# Altium PCB CAN_PDM_Pcb.PcbDoc (part 2 of 3)
Units mm, origin at the board's own origin, x right, y up, seen from the top; angles counter-clockwise.
Board outline 120 x 90 mm, 4 copper layers (Top Layer, Int1 (GND-PWR), Int2 (PWR-3V3), Bottom Layer), stack 1.51 mm thick; 313 components, 200 nets, 938 pads, 544 vias.
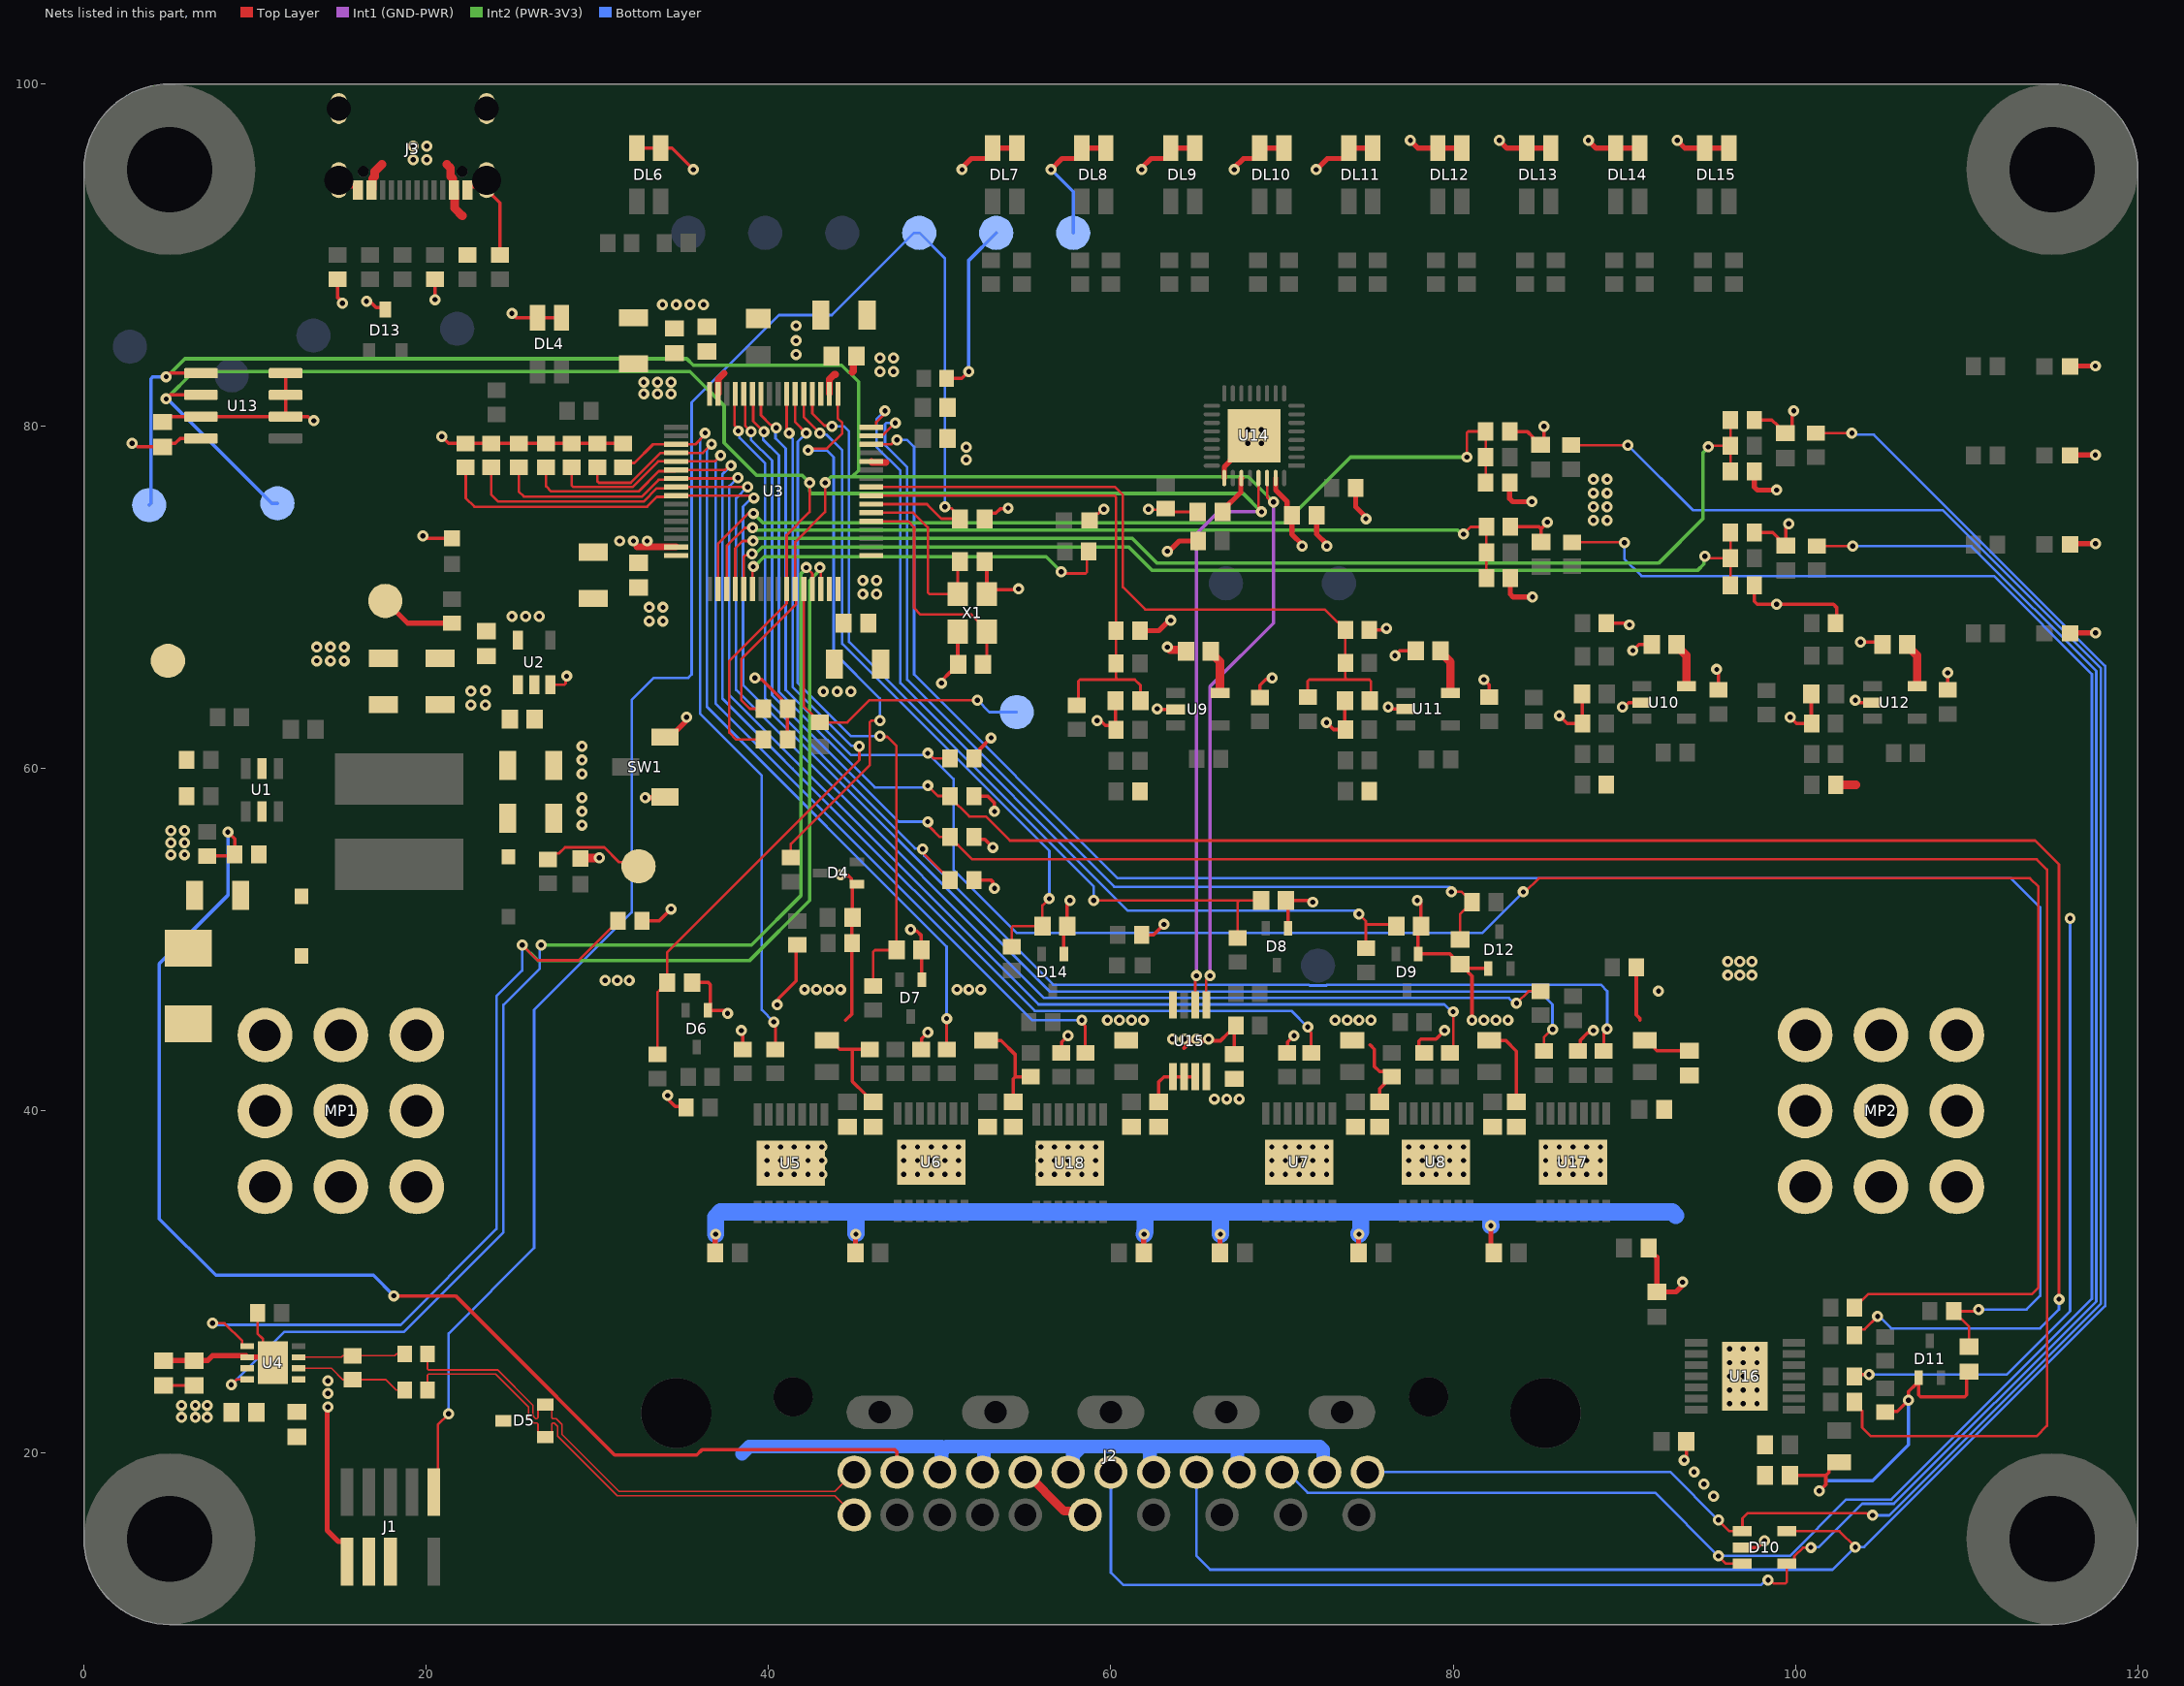
[diagram p4: the nets of this part, all layers, seen from the top]

## Part data
C1: Case=1206, Manufacturer=KEMET, PartNumber=C1206C225K5RAC, Voltage=50V
C2: Case=0606, Manufacturer=KEMET, PartNumber=C0603C104K5RACTU, Voltage=50V
C3 C4 C5 C6 C9 C11 C13 C15: Case=1206, Manufacturer="Samsung Electro-Mechanics", PartNumber=CL31B106KBHNNNE, Voltage=50V
C7 C8 C18 C59 C60: Case=0603, Manufacturer=KEMET, PartNumber=C0603C105K8RACTU, Voltage=10V
C10 C12 C14 C16 C17 C21 C23 C24 C25 C27 C28 C30 C34 C38 C42 C47 C48 C51 C52 C57 C58 C62 C67 C72: Case=0603, Manufacturer=KEMET, PartNumber=C0603C104K5RACTU, Voltage=50V
C19 C20: Case=0603, Manufacturer=YAGEO, PartNumber=CC0603FRNPO0BN270, Voltage=100V
C22: Case=0805, Manufacturer=KEMET, PartNumber=C1206C475K5RACTU, Voltage=50V
C26: Case=0603, Manufacturer=YAGEO, PartNumber=CC0603KRX7R9BB473, Voltage=50V
C29 C33 C37 C41 C61 C66 C71: Case=0603, Manufacturer=KEMET, PartNumber=C0603C473M5RACTU, Voltage=50V
C31 C35 C39 C43 C63 C64 C68 C69 C73: Case=0603, Manufacturer=KEMET, PartNumber=C0603C103M5RACTM, Voltage=50V
C32 C36 C40 C44 C65 C70 C74: Case=0603, Manufacturer=KEMET, PartNumber=C0603C221J5RACTU, Voltage=50V
C45 C46 C49 C50: Case=0603
C53 C54 C55 C56: Case=0603, Manufacturer=KEMET, PartNumber=C0603C103K1RACTU, Voltage=100V
D1 D2: Case=SOD123, Manufacturer=Nexperia, PartNumber=PMEG4010EGWX
D3: library part Diode_TVS_Bid, Case=SMB-2, Manufacturer=Littelfuse, PartNumber=SZ1SMB20CAT3G, Voltage=20V
D4: Case=SOT323, Manufacturer=Nexperia, PartNumber=BZX84W-C4V7-QX
D5: library part SM712-02HTG, "ESD Diode bid", Case=SOT23-3, Manufacturer=Littelfuse, PartNumber=SM712-02HTG
D6: Case=SOT-323-3, Manufacturer=NEXPERIA, PartNumber=BZX84W-C4V7-QX
D7 D8 D9 D11 D12 D14: Case=SOT-323-3, Manufacturer=Nexperia, PartNumber=BZX84W-C4V7-QX
D10: library part SP0504BAHTG, Case=SOT-23-5, Manufacturer=Littelfuse, PartNumber=SP0504BAHTG
D13: "ESD Diode bid -7 to 12v", Case=SOT23-3, Manufacturer=Littelfuse, PartNumber=SM712-02HTG
DL1 DL2: library part LED_Green, Case=0603, Manufacturer="Wurth Elektronik", PartNumber=150060GS75000
DL3: library part LED_Blue, Case=0603, Manufacturer="Wurth Elektronik", PartNumber=150060BS75000
DL4 DL6: "Led Yellow - Blue 3528", Case=3528, Manufacturer=Wurth, PartNumber=150141YB73100
DL5: Case=0603, Manufacturer="Wurth Elektronik", PartNumber=150060RS75000
DL7 DL8 DL9 DL10 DL11 DL12 DL13 DL14 DL15: "Led Red - Green 3528", Case=3528, Manufacturer=Wurth, PartNumber=150141RV73100
DL16 DL17 DL18 DL19: library part LED_Blue, Case=0603, Manufacturer="Wurth Elektronik", PartNumber=150060BS55040
J1: library part FTSH-105-X-X-DV-007-P-X, Manufacturer=Samtech, PartNumber=FTSH-105-01-L-DV-007-K
J2: library part MOLEX_477450100, "Connector Header Board Edge, Through Hole, Right Angle 28 position", Manufacturer=Molex, PartNumber=0477450100
J3: "USB Connectors USB Type C,2.0, Rec,SMT, 0.95mmTH Shell Stakes,G/F,RA,Top Mnt,T&R", Case=USB-C, Manufacturer=GCT, PartNumber=USB4105-GF-A
L1: Case=SDE0805A, Manufacturer=BOURNS, PartNumber=SDE0805A-180M
L2: Case=0603, Manufacturer=TDK, PartNumber=MMZ1608R601ATD25
L3 L4: Case=0603, Manufacturer=Murata, PartNumber=BLM18HB331SN1D
MP1 MP2: library part 74651195R, Manufacturer="Wurth Electronics", PartNumber=74651195R
R1: library part Resistor, Case=0603, Manufacturer=Vishay, PartNumber=CRCW060388K7FKEAC
R2 R16 R17 R100 R101 R124 R125 R126 R127 R128 R129 R130 R131 R132 R133 R134 R135 R136 R137 R138 R139 R140 R141: library part Resistor, Case=0603, Manufacturer=Vishay, PartNumber=RC0603FR-071K3L
R3 R4 R9 R14 R15 R18 R19 R32 R33 R46 R47 R58 R59 R62 R63 R74 R75 R78 R79 R84 R85 R86 R87 R92 R93 R102 R103 R104 R113 R114 R115 R152: library part Resistor, Case=0603, Manufacturer=YAGEO, PartNumber=AC0603FR-0710KL
R5: library part Resistor, Case=0603, Manufacturer=Vishay, PartNumber=CRCW060322K1FKEA
R6 R8 R99 R142 R143 R144 R145: library part Resistor, Case=0603, Manufacturer=Vishay, PartNumber=RC0603FR-07560RL
R7 R11 R48 R49 R50 R51 R54 R55 R60 R61 R64 R65 R66 R67 R70 R71 R76 R77 R146 R147: library part Resistor, Case=0603, Manufacturer=YAGEO, PartNumber=RC0603JR-070RL
R10: library part Resistor, Case=0603, Manufacturer=Vishay, PartNumber=CRCW060351K0FKEA
R12: library part Resistor, Case=0603, Manufacturer=Vishay, PartNumber=CRCW06037K50FKEA
R13: library part Resistor, Case=0603, Manufacturer=Vishay, PartNumber=CRCW0603120RFKEA
R20 R26 R34 R40 R105 R116 R153: library part Resistor, Case=0805, Manufacturer=Vishay, PartNumber=CRCW080547R0FKEA
R21 R22 R23 R24 R27 R28 R29 R30 R35 R36 R37 R38 R41 R42 R43 R44 R80 R81 R82 R83 R88 R89 R90 R91 R106 R107 R108 R109 R110 R111 R117 R118 R119 R120 R121 R122 R154 R155 R156 R157: library part Resistor, Case=0603, Manufacturer=YAGEO, PartNumber=RC0603FR-074K7L
R25 R31 R39 R45 R112 R123 R158: library part Resistor, Case=0603, Manufacturer=Vishay, PartNumber=CRCW06031K20FKEA
R52 R53 R56 R57 R68 R69 R72 R73: library part Resistor, Case=0603, Manufacturer=Vishay, PartNumber=CRCW060315K0FKEC
R94 R95: library part Resistor, Case=0603, Manufacturer=Vishay, PartNumber=CRCW06034K70FKEB
R96 R97: library part Resistor, Case=0603, Manufacturer=Vishay, PartNumber=CRCW060310K0FKEA
R98: library part Resistor, Case=0603, Manufacturer=Vishay, PartNumber=CRCW06030000Z0EAC
R148 R149: library part Resistor, "Resistor", Case=0603, Manufacturer=Vishay, PartNumber=CRCW06035K10FKEC
R150 R151: Case=0603, Manufacturer=Vishay, PartNumber=CRCW06035K10FKEC
SW1: library part SWITCH_SPDT, Manufacturer="Nidec Components", PartNumber=CJS-1200TA
TP1 TP2 TP3 TP4 TP5 TP6 TP7 TP8 TP9 TP12 TP13 TP14 TP15 TP16 TP24: library part Test_Point
TP19 TP20 TP21 TP22: library part Test_Point, "Test Poin"
U1: library part LV3842XDBVR, "4-V to 36-V, 600-mA synchronous step-down converter", Case=6-SOT-23, Manufacturer="Texas Instruments", PartNumber=LV3842XDBVR
U2: "LDO Voltage Regulators 500-mA high-PSRR low-IQ low-dropout voltage regulator with enable", Case=SOT-23-5, Manufacturer="Texas Instruments", PartNumber=TLV75533PDBVR
U3: "IC MCU 32BIT 512KB FLASH 64LQFP", Manufacturer=ST, PartNumber=STM32F446RET6
U4: library part TJA1051TK/3, "CAN HIGH-SPEED CAN TRANSCEIVER 3.3V / 5V Pin VIO", Case=HVSON-8, Manufacturer="NXP Semiconductors", PartNumber=TJA1051TK/3,118
U5 U6 U18: "Smart High-Side Power Switch 21A", Case=TSDSO-14, Manufacturer="Infineon Technologies", PartNumber=BTS70021EPPXUMA1
U7 U8: "Smart High-Side Power Switch 15A", Case=TSDSO-14, Manufacturer="Infineon Technologies", PartNumber=BTS70041EPZXUMA1
U9 U10 U11 U12: "Amp. op. One-channel, 1-MHz rail-to-rail input and output 1.8-V to 5.5-V operational amplifier 5-SOT-23 -40 to 125", Case=SOT23-5, Manufacturer="Texas Instrument", PartNumber=TLV9001IDBVR
U13: "F-RAM 4kbit FRAM, I2C, 3.0V 5.5V - SOP8 T&R", Manufacturer="Infineon Technologies", PartNumber=FM24CL16B-GTR
U14: "IC EXPANDER 24B 32HUQFN", Case=HUQFN-32, Manufacturer="NXP Semiconductors", PartNumber=PCAL6524HEAZ
U15: "+ / - 0.5 degC Maximum Accuracy Digital Temperature Sensor, 400 uA, 2.7 to 5.5 V, -40 to 125 degC, 8-pin MSOP (MS8), Tube", Case=MSOP-8, Manufacturer=Microchip, PartNumber=MCP9808-E/MS
U16: "Smart High-Side Power Switch 7.5A", Case=TSDSO-14, Manufacturer="Infineon Technologies", PartNumber=BTS70082EPZXUMA1
U17: "Smart High-Side Power Switch 3A", Case=TSDSO-14, Manufacturer="Infineon Technologies", PartNumber=BTS70802EPAXUMA1
X1: library part Crystal, Manufacturer=Abracom, PartNumber=ABM8AIG-8.000MHZ-1Z-T

## Free pads (board coordinates)
  round 10 hole 5 unplated: ""(5,15) ""(5,95) ""(115,15) ""(115,95)

## Via types
v1: diameter 0.65, hole 0.3, Top Layer to Bottom Layer, 543 vias
v2: diameter 0.63, hole 0.3, Top Layer to Bottom Layer, 1 vias

## Nets (pads, with @x,y where several pads share a name; then routed paths per layer and width w, separated by ;. In a path a pad name is that pad's centre, name@x,y a point inside that pad or via, vN(x,y) a via of type N, cw(c..) or ccw(c..) an arc to the next point about the centre after c; other vN are vias at no path point)
5V: C3.1 C4.1 C5.1 C6.1 C7.1 C25.1 C26.1 C28.1 C47.1 C48.1 C51.1 C52.1 C59.1 D2.C J3.A4-B9 J3.B4-A9 R2.2 R48.2 R50.2 R64.2 R66.2 R148.2 TP6.1 U2.1 U2.3 U4.3 U9.5 U10.5 U11.5 U12.5 U14.27 | length 28.6
  Top Layer w0.15: C25.1@4.638,23.965 C26.1@6.438,23.965 ; R2.2@27.1,54.7 27.447,55.047 27.747,55.047 28.1,55.4 30.4,55.4 31.263,54.537 32.163,54.537 TP6.1@32.4,54.3 ; U2.3@27.25,64.9 28.046,64.9 28.134,64.988 28.134,65.334 v1(28.2,65.4)
  Top Layer w0.3: C59.1@66.525,75 66.525,75.075 67.595,76.145 67.595,76.944 U14.27@67.626,76.974
  Top Layer w0.5: J3.B4-A9@16.8,93.81 16.85,93.86 16.85,94.47 16.985,94.605 16.985,94.885 17.4,95.3 ; 21.2,95.3 21.415,95.085 21.415,94.605 21.55,94.47 21.55,93.86 J3.A4-B9@21.6,93.81 21.65,93.76 21.65,92.75 22.1,92.3 ; C47.1@65.837,66.861 65.837,66.786 66.378,66.245 U9.5@66.378,64.415 ; C51.1@79.261,66.875 79.261,66.8 79.836,66.225 U11.5@79.836,64.429 ; C48.1@93.055,67.261 93.055,67.186 93.63,66.611 U10.5@93.63,64.815 ; R66.2@102.358,59.054 103.529,59.054 ; C52.1@106.537,67.261 106.537,67.186 107.112,66.611 U12.5@107.112,64.811
  other v1: 5.7,22.1 6.5,22.1 7.2,22.1 5.7,22.8 6.5,22.8 7.2,22.8 22.6,63.725 23.45,63.725 22.6,64.525 23.45,64.55 88.2,74.5 89,74.5 88.2,75.3 89,75.3 88.2,76.1 89,76.1 88.2,76.9 89,76.9 19.225,95.575 20.025,95.575 19.225,96.375 20.025,96.375
+3V3: C8.1 C9.1 C10.1 C11.1 C12.1 C13.1 C14.1 C15.1 C16.1 C23.1 C27.1 C28.2 C57.1 C58.1 C60.1 J1.1 J2.8 J2.9 J2.11 J2.13 J2.15 J2.17 L2.1 R6.2 R14.2 R21.2 R27.2 R35.2 R41.2 R49.2 R51.2 R65.2 R67.2 R78.2 R79.2 R86.2 R87.2 R94.2 R95.2 R96.2 R97.2 R99.2 R106.2 R117.2 R154.2 SW1.1 TP7.1 TP8.1 U2.5 U3.1 U3.19 U3.32 U3.48 U3.64 U4.5 U13.8 U14.31 U15.8 | length 154.5
  Top Layer w0.2: v1(2.8,79) 2.922,79 3.122,78.8 C57.1@4.6,78.8 4.808,79.008 5.333,79.008 5.62,79.295 U13.8@6.825,79.295 ; R14.2@32.6,51.1 33.6,51.1 v1(34.3,51.8) ; v1(38.4,44.7) 38.5,44.6 R21.2@38.5,43.6 ; v1(39.2,65.3) 39.286,65.214 39.586,65.214 40.75,64.05 40.75,63.85 R94.2@41.1,63.5 R95.2@41.1,61.7 ; R27.2@48.9,43.6 48.933,43.633 48.933,44.233 v1(49.3,44.6) ; L2.1@50.4,82.8 51.3,82.8 v1(51.7,83.2) ; R154.2@57.1,43.4 57.133,43.433 57.133,44.033 v1(57.5,44.4) ; R99.2@61.8,50.3 62.5,50.3 v1(63.1,50.9) ; R35.2@70.3,43.4 70.333,43.433 70.333,44.033 v1(70.7,44.4) ; R65.2@75.1,68.101 76.001,68.101 v1(76.1,68.2) ; R41.2@78.3,43.4 78,43.7 78,44.083 78.117,44.2 79,44.2 v1(79.5,44.7) ; R117.2@87.3,43.5 87.433,43.633 87.433,44.133 87.858,44.558 87.936,44.558 88.078,44.7 v1(88.2,44.7) ; R51.2@88.95,68.497 90.203,68.497 v1(90.3,68.4) ; R87.2@97.6,70.7 97.6,69.776 97.776,69.6 v1(98.9,69.6) 102.224,69.6 102.4,69.424 102.4,68.55 R67.2@102.35,68.5 ; R106.2@103.45,24.5 103.55,24.6 v1(104.3,24.6)
  Top Layer w0.3: v1(14.25,22.7) 14.2,22.65 14.2,15.5 14.853,14.847 15.065,14.847 15.36,14.552 J1.1@15.36,13.665 ; TP7.1@17.6,69.8 18.9,68.5 R6.2@21.5,68.5 ; v1(32.788,58.3) 33.9,58.3 SW1.1@33.95,58.35 ; R49.2@61.7,68.061 62.8,68.061 63.4,68.661 v1(63.5,68.661) ; v1(63.3,72.7) 63.4,72.7 64,73.3 R97.2@65.1,73.3 ; U14.31@69.626,76.974 69.626,76.274 70.301,75.599 70.301,75.074 C58.1@70.575,74.8 70.575,73.7 71.175,73.1 v1(71.175,73) ; R96.2@74.3,76.4 74.3,75.3 74.9,74.7 v1(74.9,74.6) ; R78.2@83.3,76.7 83.3,75.776 83.476,75.6 v1(84.6,75.6) ; R86.2@83.339,71.125 83.339,70.201 83.515,70.025 v1(84.639,70.025) ; R79.2@97.6,77.375 97.6,76.451 97.776,76.275 v1(98.9,76.275)
  Bottom Layer w0.15: v1(104.3,24.6) 112.342,24.6 116.05,28.308 v2(116.05,51.25)
  Bottom Layer w0.2: v1(51.7,83.2) 51.7,89.7 TP8.1@53.3,91.3
  Bottom Layer w0.8: 38.45,19.975 38.875,20.4 50.1,20.4 ; J2.8@50,18.9 50.1,19 50.1,20.1 50.4,20.4 52.7,20.4 ; J2.9@52.5,18.9 52.57,18.97 52.57,20.27 52.7,20.4 ; J2.11@57.5,18.9 57.777,19.177 57.777,19.877 58.3,20.4 ; J2.13@62.5,18.9 62.28,19.12 62.28,20.12 62,20.4 ; J2.15@67.5,18.9 67.4,19 67.4,20.2 67.2,20.4 ; J2.17@72.5,18.9 72.4,19 72.4,20.2 72.2,20.4 67.2,20.4 ; 52.7,20.4 58.3,20.4 ; 58.3,20.4 62,20.4 ; 62,20.4 67.2,20.4
  other v1: 14.25,23.5 14.25,24.225 66.049,40.7 66.769,40.7 67.5,40.7 30.45,47.625 31.15,47.625 31.85,47.625 96.05,47.925 96.75,47.925 97.45,47.925 96.05,48.725 96.75,48.725 97.45,48.725 33.025,68.625 33.825,68.625 25,68.9 25.8,68.9 26.6,68.9 33.025,69.425 33.825,69.425 45.5,70.2 46.3,70.2 45.5,71 46.3,71 32.7,81.9 33.5,81.9 34.3,81.9 32.7,82.575 33.5,82.575 34.3,82.575 41.6,84.2 41.6,85 41.6,85.875
+12V: C29.1 C30.1 C33.1 C34.1 C37.1 C38.1 C41.1 C42.1 C61.1 C62.1 C66.1 C67.1 C71.1 C72.1 D1.A D3.2 MP1.1 MP2.1 R10.2 U5.15 U6.15 U7.15 U8.15 U16.15 U17.15 U18.15 | length 4
  Top Layer w0.2: v1(40.5,46.2) 40.586,46.286 40.586,46.586 41.6,47.6 41.6,49.625 R10.2@41.675,49.7
  other v1: 96.15,22.9 96.95,22.9 97.75,22.9 96.15,23.7 96.95,23.7 97.75,23.7 96.15,24.5 96.95,24.5 97.75,24.5 96.15,25.3 96.95,25.3 97.75,25.3 96.15,26.1 96.95,26.1 97.75,26.1 39.9,36.3 40.7,36.3 41.5,36.3 42.3,36.3 43.1,36.3 47.9,36.3 48.7,36.3 49.5,36.3 50.3,36.3 51.1,36.3 55.9,36.3 56.7,36.3 57.5,36.3 58.3,36.3 59.1,36.3 69.4,36.3 70.2,36.3 71,36.3 71.8,36.3 72.6,36.3 77.4,36.3 78.2,36.3 79,36.3 79.8,36.3 80.6,36.3 85.4,36.3 86.2,36.3 87,36.3 87.8,36.3 88.6,36.3 39.9,37.1 40.7,37.1 41.5,37.1 42.3,37.1 43.1,37.1 47.9,37.1 48.7,37.1 49.5,37.1 50.3,37.1 51.1,37.1 55.9,37.1 56.7,37.1 57.5,37.1 58.3,37.1 59.1,37.1 69.4,37.1 70.2,37.1 71,37.1 71.8,37.1 72.6,37.1 77.4,37.1 78.2,37.1 79,37.1 79.8,37.1 80.6,37.1 85.4,37.1 86.2,37.1 87,37.1 87.8,37.1 88.6,37.1 39.9,37.9 40.7,37.9 41.5,37.9 42.3,37.9 43.1,37.9 47.9,37.9 48.7,37.9 49.5,37.9 50.3,37.9 51.1,37.9 55.9,37.9 56.7,37.9 57.5,37.9 58.3,37.9 59.1,37.9 69.4,37.9 70.2,37.9 71,37.9 71.8,37.9 72.6,37.9 77.4,37.9 78.2,37.9 79,37.9 79.8,37.9 80.6,37.9 85.4,37.9 86.2,37.9 87,37.9 87.8,37.9 88.6,37.9
+12VPRT: C1.1 D1.C R7.1 U1.5
CAN0_IC_N: L4.1 R13.1 U4.6 | length 6.7
  Top Layer w0.1: U4.6@12.538,24.965 14.46,24.965 15.125,24.3 R13.1@15.7,24.3 17.65,24.3 18.25,23.7 L4.1@18.735,23.7
CAN0_IC_P: L3.1 R13.2 U4.7 | length 6.3
  Top Layer w0.1: U4.7@12.538,25.615 15.04,25.615 15.125,25.7 R13.2@15.7,25.7 18.15,25.7 18.25,25.8 L3.1@18.735,25.8
CAN_N: D5.1 J2.19 L4.2 | length 31.2
  Top Layer w0.1: L4.2@20.065,23.7 20.065,24.566 20.124,24.624 24.048,24.624 25.974,22.699 25.974,22.08 26.28,21.774 26.466,21.774 26.525,21.716 26.525,21.25 26.825,20.95 D5.1@26.95,20.95 27.036,20.95 27.336,21.25 27.336,21.716 27.395,21.774 27.478,21.774 27.675,21.577 27.675,20.998 31.148,17.525 43.875,17.525 J2.19@45,16.4
CAN_P: D5.2 J2.6 L3.2 | length 31.2
  Top Layer w0.1: L3.2@20.065,25.8 20.065,24.934 20.124,24.876 24.152,24.876 26.225,22.802 26.225,22.184 26.384,22.025 26.466,22.025 26.525,22.084 26.525,22.55 26.825,22.85 D5.2@26.95,22.85 27.036,22.85 27.336,22.55 27.336,22.084 27.395,22.025 27.582,22.025 27.926,21.681 27.926,21.101 31.252,17.776 43.876,17.776 J2.6@45,18.9
D1_IN: D10.1 J2.18 R80.1 | length 123.8
  Top Layer w0.15: R80.1@86.9,78.9 v1(90.2,78.9) ; v1(95.5,16.1) 96.15,15.45 D10.1@96.9,15.45 96.9,16.2 97.2,16.5 102.762,16.5 102.766,16.496 104.162,16.496 104.187,16.471 104.404,16.471 v1(104.5,16.375)
  Bottom Layer w0.15: J2.18@75,18.9 92.7,18.9 v1(95.5,16.1) ; v1(90.2,78.9) 94,75.1 108.6,75.1 117.85,65.85 117.85,28.75 105.475,16.375 v1(104.5,16.375)
D2_IN: D10.3 J2.16 R88.1 | length 127.8
  Top Layer w0.15: R88.1@86.939,73.225 89.975,73.225 v1(90,73.2) ; v1(95.5,14) 95.95,13.55 D10.3@96.9,13.55
  Bottom Layer w0.15: J2.16@70,18.9 70.3,18.9 71.5,17.7 91.8,17.7 v1(95.5,14) 99.675,14 102.975,17.3 105.6,17.3 117.325,29.025 117.325,65.525 111.6,71.25 91.014,71.25 90,72.264 v1(90,73.2)
D3_IN: D10.5 J2.14 R82.1 | length 129
  Top Layer w0.15: D10.5@99.5,15.45 102.575,15.45 v1(103.5,14.525) ; R82.1@101.2,79.6 v1(103.3,79.6)
  Bottom Layer w0.15: J2.14@65,18.9 65,14 65.8,13.2 102.175,13.2 v1(103.5,14.525) 104.025,14.525 118.1,28.6 118.1,66 104.589,79.511 103.389,79.511 v1(103.3,79.6)
D4_IN: D10.4 J2.12 R90.1 | length 127.7
  Top Layer w0.15: v1(98.4,12.587) 98.535,12.587 98.722,12.4 99.412,12.4 99.5,12.488 D10.4@99.5,13.55 99.709,13.55 99.934,13.775 99.934,13.984 100.438,14.488 100.888,14.488 v1(100.9,14.5) ; R90.1@101.239,73 v1(103.339,73)
  Bottom Layer w0.15: J2.12@60,18.9 60,13.025 60.725,12.3 97.978,12.3 98.265,12.587 v1(98.4,12.587) ; v1(100.9,14.5) 100.912,14.512 101.362,14.512 103.9,17.05 105.75,17.05 117.575,28.875 117.575,65.7 110.275,73 v1(103.339,73)
GND: C1.2 C3.2 C4.2 C5.2 C6.2 C7.2 C8.2 C9.2 C10.2 C11.2 C12.2 C13.2 C14.2 C15.2 C16.2 C17.2 C18.2 C19.2 C20.2 C21.2 C22.2 C23.2 C24.2 C25.2 C26.2 C27.2 C30.2 C31.2 C32.2 C34.2 C35.2 C36.2 C38.2 C39.2 C40.2 C42.2 C43.2 C44.2 C45.2 C46.2 C47.2 C48.2 C49.2 C50.2 C51.2 C52.2 C53.2 C54.2 C55.2 C56.2 C57.2 C58.2 C59.2 C60.2 C62.2 C63.2 C64.2 C65.2 C67.2 C68.2 C69.2 C70.2 C72.2 C73.2 C74.2 D3.1 D4.A D5.3 D6.A D7.A D8.A D9.A D10.2 D11.A D12.A D13.3 D14.A DL1.C DL2.C DL3.C DL4.C1 DL4.C2 DL6.C1 DL6.C2 DL7.C1 DL7.C2 DL8.C1 DL8.C2 DL9.C1 DL9.C2 DL10.C1 DL10.C2 DL11.C1 DL11.C2 DL12.C1 DL12.C2 DL13.C1 DL13.C2 DL14.C1 DL14.C2 DL15.C1 DL15.C2 DL16.C DL17.C DL18.C DL19.C J1.3 J1.5 J2.10 J2.24 J3.1 J3.2 J3.3 J3.4 J3.A1-B12 J3.B1-A12 R4.1 R5.1 R12.1 R15.1 R18.1 R19.1 R20.2 R25.1 R26.2 R31.1 R32.1 R33.1 R34.2 R39.1 R40.2 R45.1 R52.2 R53.2 R58.1 R59.1 R68.2 R69.2 R74.1 R75.1 R84.1 R85.1 R92.1 R93.1 R98.2 R102.1 R103.1 R104.1 R105.2 R112.1 R113.1 R114.1 R115.1 R116.2 R123.1 R149.1 R150.1 R151.1 R152.1 R153.2 R158.1 SW1.3 TP9.1 TP24.1 U1.2 U2.2 U3.12 U3.18 U3.31 U3.47 U3.63 U4.2 U4.9 U9.2 U10.2 U11.2 U12.2 U13.2 U13.3 U13.4 U13.7 U14.25 U14.33 U15.4 U15.5 U15.6 U15.7 X1.2 X1.4 | length 342.9
  Top Layer w0.15: R15.1@10.138,28.19 10.138,26.99 10.45,26.677 10.45,26.465 10.825,26.09 U4.9@11.038,26.09 ; DL3.C@58.75,74.5 59.15,74.9 59.258,74.9 59.508,75.15 v1(59.596,75.15) ; v1(62.196,75.15) 62.224,75.121 63.121,75.121 R98.2@63.2,75.2 63.4,75 C59.2@65.075,75
  Top Layer w0.2: C57.2@4.6,80.25 4.915,80.565 U13.7@6.825,80.565 U13.2@11.775,80.565 ; U13.3@11.775,81.835 U13.2@11.775,80.565 ; U13.4@11.775,83.105 11.775,81.975 U13.3@11.845,81.905 ; v1(13.425,80.325) 13.323,80.325 13.083,80.565 U13.2@11.775,80.565 ; R151.1@14.8,88.6 14.8,87.542 15.1,87.242 v1(15.1,87.2) ; v1(16.5,87.3) 16.7,87.3 17.067,86.933 17.492,86.933 D13.3@17.6,86.825 ; v1(19.8,73.6) 19.95,73.45 DL2.C@21.5,73.45 ; v1(20.5,87.4) R150.1@20.5,88.6 ; v1(20.9,79.4) 21.3,79 R115.1@22.3,79 R113.1@23.8,79 R32.1@25.4,79 R33.1@27,79 R152.1@28.5,79 R18.1@30,79 R19.1@31.5,79 ; J3.1@23.52,94.385 23.52,93.835 24.3,93.055 R149.1@24.3,90 ; v1(25,86.6) 25.25,86.35 DL4.C2@26.5,86.35 DL4.C1@27.9,86.35 ; DL6.C2@32.3,96.25 34.35,96.25 v1(35.6,95) ; v1(34.1,40.904) 34.186,40.818 34.186,40.614 34.542,40.258 35.117,40.258 R25.1@35.175,40.2 ; C32.2@35.525,47.5 36.483,47.5 36.6,47.383 36.6,46.025 D6.A@36.45,45.875 37.425,45.875 v1(37.6,45.7) ; R20.2@43.4,44.125 43.625,44.125 44.15,43.6 44.9,43.6 ; v1(44.2,53.8) 44.242,53.758 44.642,53.758 44.825,53.575 44.825,53.4 44.975,53.25 D4.A@45.05,53.25 ; 44.5,45.3 44.875,45.675 R12.1@44.875,49.8 44.875,51.275 C24.2@44.9,51.3 44.9,53.1 D4.A@45.05,53.25 ; D4.A@45.15,53.25 D4.A@45.05,53.25 ; R31.1@45.9,43.6 44.9,43.6 ; C30.2@46.1,40.525 46.025,40.525 45.65,40.9 45.65,40.975 44.9,41.725 44.9,43.6 ; v1(48.3,50.6) 48.386,50.514 48.657,50.514 48.925,50.246 C36.2@48.925,49.4 48.95,49.375 D7.A@48.95,47.675 ; v1(50.1,65) 50.1,65.125 50.625,65.65 50.7,65.65 51.075,66.025 C19.2@51.075,66.1 51.05,66.125 X1.4@51.05,68 ; R114.1@52,53.5 52.978,53.5 53.114,53.364 53.114,53.086 v1(53.2,53) ; R103.1@52,56 52.133,55.867 52.633,55.867 v1(53.1,55.4) ; R104.1@52,58.4 52.8,58.4 53.2,58 v1(53.2,57.5) ; R102.1@52,60.6 52.35,60.95 52.35,61.15 v1(53,61.8) ; C20.2@52.625,72.1 52.75,71.975 52.75,71.25 ; C21.2@52.625,74.6 52.958,74.933 53.283,74.933 53.543,75.193 53.964,75.193 v1(53.996,75.225) ; R26.2@52.7,44.125 52.708,44.117 53.583,44.117 54.417,43.283 54.417,42 ; X1.2@52.75,70.2 X1.2@52.75,70.8 ; 52.75,71.23 X1.2@52.75,70.8 ; C34.2@54.3,40.525 54.3,41.883 54.417,42 ; v1(54.6,70.5) 54.567,70.467 53.083,70.467 X1.2@52.75,70.8 ; R158.1@55.3,42 54.417,42 ; D14.A@57.25,49.175 57.25,50.6 C74.2@57.45,50.8 57.45,52.15 v1(57.6,52.3) ; v1(59.2,62.8) 59.4,62.8 59.667,62.533 60.028,62.533 R58.1@60.275,62.286 ; C45.2@60.275,63.961 R58.1@60.275,62.286 ; R58.1@60.3,62.261 R58.1@60.275,62.286 ; v1(62.7,63.5) 62.735,63.465 U9.2@63.778,63.465 ; C72.2@62.8,40.525 62.8,41.7 63.1,42 U15.5@63.625,42 U15.6@64.275,42 U15.7@64.925,42 ; 64.275,43.675 64.5,43.9 64.5,44.1 66.4,44.1 66.875,44.575 66.95,44.575 R39.1@67.2,44.825 ; C60.2@67.2,43.325 R39.1@67.2,44.825 ; R39.1@67.2,44.9 R39.1@67.2,44.825 ; R52.2@68.712,64.161 68.712,64.872 69.054,65.214 69.343,65.214 v1(69.429,65.3) ; D8.A@70.35,50.675 70.35,52.175 C40.2@70.225,52.3 71.7,52.3 v1(71.8,52.2) ; v1(72.6,62.7) 73.016,62.284 R74.1@73.7,62.284 73.675,62.309 C49.2@73.675,63.975 ; 75.15,43.85 75.4,43.6 75.4,42.6 75.7,42.3 76.1,42.3 R45.1@76.4,42 76.325,42 75.975,41.65 75.975,41.575 75.7,41.3 C38.2@75.7,40.525 ; v1(76.2,63.6) 76.2,63.596 76.317,63.479 U11.2@77.236,63.479 ; v1(76.6,66.6) 76.875,66.875 C51.2@77.811,66.875 ; v1(77.9,52.3) 78.008,52.3 78.125,52.183 C44.2@78.125,50.8 77.95,50.625 D9.A@77.95,49.175 79.8,49.175 79.95,49.025 79.95,48.95 80.325,48.575 C70.2@80.4,48.575 80.475,48.575 C70.2@80.725,48.325 ; v1(81.1,45.3) 81.1,47.875 80.85,48.125 80.85,48.2 C70.2@80.725,48.325 ; v1(81.8,65.2) 82.093,64.907 R68.2@82.093,64.175 ; D12.A@82.05,48.325 C70.2@80.725,48.325 ; R40.2@82.1,44.125 83.075,44.125 83.7,43.5 C42.2@83.7,40.525 ; R84.1@83.3,79.7 84.325,79.7 84.65,79.375 84.65,79.3 85.025,78.925 C53.2@85.1,78.925 85.3,79.125 v1(85.3,80) ; R92.1@83.339,74.125 85.022,74.125 85.139,74.008 ; C55.2@85.139,73.25 85.139,74.008 ; v1(85.5,74.4) 85.5,74.369 85.139,74.008 ; v1(86.2,63.1) 86.661,62.639 R59.1@87.55,62.639 87.55,64.336 C46.2@87.525,64.361 ; v1(89.9,63.6) 90,63.6 90.265,63.865 U10.2@91.03,63.865 ; v1(90.5,66.9) 90.861,67.261 C48.2@91.605,67.261 ; R123.1@90.7,48.4 90.7,45.622 90.9,45.422 90.9,45.3 ; R116.2@91.2,44.125 91.425,44.125 91.8,43.75 91.8,43.642 91.917,43.525 C67.2@93.8,43.525 ; v1(93.5,19.6) 93.625,19.725 C63.2@93.625,20.7 ; v1(95.4,65.8) 95.5,65.7 R53.2@95.5,64.6 ; D10.2@96.9,14.5 97.8,14.5 v1(98.2,14.9) ; R93.1@97.6,73.8 98.664,73.8 98.989,73.475 98.989,73.4 99.364,73.025 C56.2@99.439,73.025 99.439,74.183 99.556,74.3 v1(99.6,74.3) ; R85.1@97.6,80.375 98.625,80.375 98.95,80.05 98.95,79.975 99.325,79.6 C54.2@99.4,79.6 99.425,79.6 99.8,79.975 99.8,80.8 v1(99.9,80.9) ; C62.2@99.675,18.7 101.775,18.7 ; v1(99.7,63) 100.061,62.639 R75.1@100.95,62.639 100.925,62.664 C50.2@100.925,64.361 ; v1(101.4,17.8) 101.775,18.175 101.775,18.7 ; R105.2@102.55,19.475 102.325,19.475 101.95,19.1 101.95,18.875 101.775,18.7 ; v1(103.5,64) 103.639,63.861 U12.2@104.512,63.861 ; v1(103.8,67.4) 104.948,67.4 C52.2@105.087,67.261 ; R112.1@105.25,22.4 105.308,22.458 105.958,22.458 v1(106.6,23.1) 106.6,23.6 107.05,24.05 107.05,24.1 107.15,24.2 D11.A@107.2,24.2 ; D11.A@107.2,24.425 D11.A@107.2,24.2 ; R69.2@108.9,64.6 v1(108.9,65.6) ; C65.2@110.15,24.775 110,24.625 110,23.417 109.883,23.3 107.317,23.3 107.2,23.417 D11.A@107.2,24.2
  Top Layer w0.3: C25.2@4.638,25.415 C26.2@6.438,25.415 7.215,25.415 7.5,25.7 9.453,25.7 U4.2@9.538,25.615 10.713,25.615 U4.9@11.038,25.29 ; SW1.3@33.95,61.85 34.25,61.85 35.133,62.733 35.133,62.933 v1(35.2,63) ; C31.2@36.875,31.7 36.875,32.775 v1(36.9,32.8) ; C35.2@45.075,31.7 45.075,32.775 v1(45.1,32.8) ; v1@51.3,95.1 51.85,95.65 52.8,95.65 53.1,95.95 DL7.C2@53.1,96.25 DL7.C1@54.5,96.25 ; v1(56.5,95) 57.15,95.65 58,95.65 58.3,95.95 DL8.C2@58.3,96.25 DL8.C1@59.7,96.25 ; v1@61.8,95.1 62.35,95.65 63.2,95.65 63.5,95.95 DL9.C2@63.5,96.25 DL9.C1@64.9,96.25 ; C73.2@61.92,31.7 61.92,32.775 v1(61.945,32.8) ; C39.2@66.375,31.7 66.375,32.775 v1(66.4,32.8) ; U14.25@66.626,76.974 66.626,77.626 66.976,77.976 66.976,78.05 67.126,78.2 U14.33@67.2,78.2 ; v1@67.2,95.1 67.75,95.65 68.4,95.65 68.7,95.95 DL10.C2@68.7,96.25 DL10.C1@70.1,96.25 ; v1(72,95) 72.65,95.65 73.6,95.65 73.9,95.95 DL11.C2@73.9,96.25 DL11.C1@75.3,96.25 ; C58.2@72.025,74.8 72.025,73.7 72.625,73.1 v1(72.625,73) ; C43.2@74.475,31.7 74.475,32.775 v1(74.5,32.8) ; v1(77.5,96.7) 77.95,96.25 DL12.C2@79.1,96.25 DL12.C1@80.5,96.25 ; v1(82.2,33.3) 82.2,32.1 82.3,32 C69.2@82.375,32 ; v1(82.7,96.7) 83.15,96.25 DL13.C2@84.3,96.25 DL13.C1@85.7,96.25 ; v1(87.9,96.7) 88.35,96.25 DL14.C2@89.5,96.25 DL14.C1@90.9,96.25 ; C68.2@91.425,32 91.425,31.925 91.9,31.45 C64.2@91.9,29.425 93.025,29.425 93.4,29.8 v1(93.4,30) ; v1(93.1,96.7) 93.55,96.25 DL15.C2@94.7,96.25 DL15.C1@96.1,96.25 ; DL17.C@116.025,78.275 DL17.C@116.05,78.3 116.075,78.325 v1(117.525,78.325) ; DL16.C@116.025,83.475 DL16.C@116.05,83.5 116.075,83.525 v1(117.525,83.525) ; DL19.C@116.038,67.887 116.088,67.937 v1(117.538,67.937) ; DL18.C@116.038,73.088 116.088,73.137 v1(117.538,73.137)
  Top Layer w0.4: J3.2@14.88,94.385 14.88,94.375 15.157,94.098 15.9,94.098 16,93.998 J3.B1-A12@16,93.81 ; J3.A1-B12@22.4,93.81 22.4,93.998 22.5,94.098 23.243,94.098 23.52,94.375 J3.1@23.52,94.385 ; 32.3,72.95 U3.47@34.6,72.95 ; U3.31@37.05,81.9 37.05,82.75 37.4,83.1 ; U3.18@43.55,81.9 43.55,82.745 43.835,83.03 43.908,83.03 ; 44.891,83.15 44.946,83.205 44.946,83.921 C16.2@45.125,84.1 ; U3.12@46,77.95 46.05,77.9 46.85,77.9
  Top Layer w0.5: DL1.C@29,54.75 29.025,54.775 30.075,54.775 v1(30.1,54.8) ; J2.10@55,18.9 57.278,16.622 58.273,16.622 J2.24@58.495,16.4 ; v1(63.3,67.1) 63.455,66.945 64.303,66.945 C47.2@64.387,66.861
  Bottom Layer w0.2: v1(56.5,95) 57.8,93.7 TP9.1@57.8,91.3 ; 101.8,18.4 104.5,18.4 106.6,20.5 v1(106.6,23.1)
  Bottom Layer w1: v1(36.9,32.8) 36.9,33.807 37.193,34.1 45.1,34.1 ; v1@45.1,32.841 45.1,34.1 ; v1(61.945,32.8) 61.974,32.829 61.974,32.935 62,32.961 62,33.807 61.707,34.1 ; v1(66.4,32.8) 66.4,33.807 66.107,34.1 ; v1(74.5,32.8) 74.5,32.841 74.6,32.941 74.6,33.807 74.307,34.1 ; v1(82.2,33.3) 82.193,33.307 82.193,33.814 81.907,34.1 ; 93,33.9 92.8,34.1 81.907,34.1 ; 45.1,34.1 61.707,34.1 ; 61.707,34.1 66.107,34.1 ; 66.107,34.1 74.307,34.1 ; 74.307,34.1 81.907,34.1
  other v1: 95.225,17.5 94.65,18.2 94.075,18.9 63.6,44.2 64.3,44.2 65,44.2 65.7,44.2 59.8,45.3 60.5,45.3 61.2,45.3 61.9,45.3 73.1,45.3 73.8,45.3 74.5,45.3 75.2,45.3 81.8,45.3 82.5,45.3 83.2,45.3 92,47 42.1,47.1 42.8,47.1 43.5,47.1 44.2,47.1 51,47.1 51.7,47.1 52.4,47.1 5.075,54.975 5.875,54.975 5.075,55.675 5.875,55.675 5.075,56.375 5.875,56.375 29.1,56.7 29.1,57.5 29.1,58.3 29.1,59.7 29.1,60.5 29.1,61.3 43.2,64.5 44,64.5 44.8,64.5 13.6,66.3 14.4,66.3 15.2,66.3 13.6,67.1 14.4,67.1 15.2,67.1 31.3,73.3 32.1,73.3 32.9,73.3 51.55,78.05 51.55,78.775 68,79 68.8,79 68,79.8 68.8,79.8 46.5,83.2 47.3,83.2 46.5,84 47.3,84 33.8,87.1 34.6,87.1 35.4,87.1 36.2,87.1 51.3,95 61.8,95 67.2,95
I2C_SCL: R95.1 TP13.1 U3.58 U13.6 U14.29 U15.2 | length 133.4
  Top Layer w0.15: R95.1@39.7,61.7 38.1,61.7 37.7,62.1 37.7,66.3 41.05,69.65 U3.58@41.05,70.5 41.05,73.65 42.396,74.996 v1(42.396,76.704) ; U15.2@64.925,46.2 64.925,47.825 v1(65,47.9) ; U14.29@68.626,76.974 68.626,75.314 68.804,75.136 v1(68.804,75.001)
  Top Layer w0.2: v1(4.8,81.6) 5.035,81.835 U13.6@6.825,81.835
  Int1 (GND-PWR) w0.2: v1(65,47.9) 65,73.725 66.276,75.001 v1(68.804,75.001)
  Int2 (PWR-3V3) w0.2: v1(4.8,81.6) 6.4,83.2 35.4,83.2 37.4,81.2 37.4,79.033 39.308,77.125 41.975,77.125 v1(42.396,76.704) 42.396,76.192 42.514,76.075 67.729,76.075 v1(68.804,75.001)
  Bottom Layer w0.2: v1(4.8,81.6) 4.876,81.6 10.976,75.5 TP13.1@11.3,75.5
I2C_SDA: R94.1 TP12.1 U3.59 U13.5 U14.30 U15.1 | length 133.5
  Top Layer w0.15: R94.1@39.7,63.5 38.9,63.5 38.4,64 38.4,66.4 41.6,69.6 41.6,70.45 U3.59@41.55,70.5 41.55,73.25 43.3,75 v1(43.3,76.7) ; U15.1@65.575,46.2 65.575,47.675 v1(65.8,47.9) ; U14.30@69.126,76.974 69.126,75.854 69.405,75.575 v1(69.5,75.575)
  Top Layer w0.2: v1(4.8,82.9) 5.005,83.105 U13.5@6.825,83.105
  Int1 (GND-PWR) w0.2: v1(65.8,47.9) 65.8,64.8 69.5,68.5 v1(69.5,75.575)
  Int2 (PWR-3V3) w0.2: v1(4.8,82.9) 4.842,82.9 5.892,83.95 35.216,83.95 35.591,83.575 44.275,83.575 45.25,82.6 45.25,77.425 44.875,77.05 ; v1(43.3,76.7) 43.65,77.05 44.875,77.05 ; v1(69.5,75.575) 68.025,77.05 44.875,77.05
  Bottom Layer w0.2: TP12.1@3.8,75.4 3.9,75.5 3.9,82.783 4.017,82.9 v1(4.8,82.9)
IGNITION: J2.7 R3.1 R7.2 | length 77.5
  Top Layer w0.2: R3.1@7.2,54.9 8.7,54.9 R7.2@8.8,55 8.8,55.9 v1(8.4,56.3) ; v1(18.1,29.2) 21.708,29.2 27.625,23.283 27.625,23.275 31,19.9 35.8,19.9 36.1,20.2 47.383,20.2 47.5,20.083 J2.7@47.5,18.9
  Bottom Layer w0.2: v1(8.4,56.3) 8.4,52.6 4.4,48.6 4.4,33.7 7.7,30.4 16.9,30.4 v1(18.1,29.2)
LD_STATUS: R8.2 U3.54 | length 22.8
  Top Layer w0.15: U3.54@39.05,70.5 39.05,71.75 v1(39.1,71.8) ; v1(57.1,71.5) 57.196,71.404 57.434,71.404 57.438,71.4 58.512,71.4 58.6,71.488 58.6,72.6 R8.2@58.7,72.7
  Int2 (PWR-3V3) w0.2: v1(39.1,71.8) 39.164,71.8 39.739,72.375 56.225,72.375 v1(57.1,71.5)
MCU_BATT_REF: R11.2 U3.17 | length 33.4
  Top Layer w0.15: R11.2@41.3,54.8 41.3,55.6 45.9,60.2 45.9,62.7 46,62.8 v1(46.5,62.8) ; v1(42.3,78.6) 42.4,78.7 43.4,78.7 44.3,79.6 44.3,80.2 44.05,80.45 U3.17@44.05,81.9
  Bottom Layer w0.15: v1(42.3,78.6) 43.4,78.6 43.8,78.2 43.8,66.8 46.5,64.1 v1(46.5,62.8)
MCU_BOOT0: R9.2 TP1.1 U3.60 | length 20.6
  Top Layer w0.15: U3.60@42.05,70.5 42.05,63.65 42.55,63.15 42.55,63.075 42.925,62.7 R9.2@43,62.7 44.6,62.7 45.9,64 v1(52.2,64)
  Bottom Layer w0.15: v1(52.2,64) 52.9,63.3 TP1.1@54.5,63.3
MCU_CAN_RX: U3.61 U4.4 | length 75.4
  Top Layer w0.15: v1(8.6,24) 8.915,24.315 U4.4@9.538,24.315 ; v1(42.2,71.745) 42.55,71.395 U3.61@42.55,70.5
  Int2 (PWR-3V3) w0.2: v1(26.7,49.7) 39,49.7 41.9,52.6 41.9,71.403 42.2,71.703 v1(42.2,71.745)
  Bottom Layer w0.15: v1(8.6,24) 11.7,27.1 18.7,27.1 24.5,32.9 24.5,46.2 26.629,48.329 26.629,49.629 v1(26.7,49.7)
MCU_CAN_TX: R14.1 U3.62 U4.1 | length 85.1
  Top Layer w0.15: v1(7.5,27.6) 8.203,27.6 9.241,26.562 9.241,26.365 9.341,26.265 U4.1@9.538,26.265 ; v1(25.6,49.7) 26.5,48.8 28.9,48.8 30.75,50.65 30.825,50.65 31.2,51.025 R14.1@31.2,51.1 ; v1(43,71.745) 43.05,71.695 U3.62@43.05,70.5
  Int2 (PWR-3V3) w0.2: v1(25.6,49.7) 26.5,48.8 38.9,48.8 42.4,52.3 42.4,71 42.831,71.431
  Bottom Layer w0.15: v1(7.5,27.6) 7.6,27.5 18.5,27.5 24.1,33.1 24.1,46.7 25.6,48.2 v1(25.6,49.7)
MCU_DIG1: R78.1 R81.2 R84.2 U3.50 | length 54.5
  Top Layer w0.15: U3.50@37.05,70.5 37.05,73.15 38.811,74.911 v1(39.111,74.911) ; v1(80.8,78.2) 80.8,79.612 80.888,79.7 R84.2@81.9,79.7 R81.2@81.9,78.2 R78.1@81.9,76.7
  Int2 (PWR-3V3) w0.2: v1(39.111,74.911) 39.672,74.35 70.15,74.35 74,78.2 v1(80.8,78.2)
MCU_DIG2: R86.1 R89.2 R92.2 U3.51 | length 50.7
  Top Layer w0.15: U3.51@37.55,70.5 37.55,73.012 38.607,74.069 v1(39.069,74.069) ; v1(80.6,73.7) 81.025,74.125 R92.2@81.939,74.125 R86.1@81.939,71.125
  Int2 (PWR-3V3) w0.2: v1(39.069,74.069) 39.191,74.069 39.335,73.925 80.258,73.925 80.483,73.7 v1(80.6,73.7)
MCU_DIG3: R79.1 R83.2 R85.2 U3.52 | length 69.5
  Top Layer w0.15: U3.52@38.05,70.5 38.05,72.862 38.488,73.3 39.088,73.3 v1(39.094,73.306) ; v1(94.9,78.8) 94.975,78.875 R83.2@96.2,78.875 ; R79.1@96.2,77.375 R83.2@96.2,78.875 ; R85.2@96.2,80.375 R83.2@96.2,78.875
  Int2 (PWR-3V3) w0.2: v1(39.094,73.306) 39.216,73.306 39.36,73.45 61.25,73.45 62.7,72 92,72 94.6,74.6 94.6,78.458 94.9,78.758 v1(94.9,78.8)
MCU_DIG4: R87.1 R91.2 R93.2 U3.53 | length 64
  Top Layer w0.15: U3.53@38.55,70.5 38.55,72.383 38.638,72.47 38.95,72.47 v1(39.033,72.553) ; v1(94.7,72.4) 94.835,72.4 94.935,72.3 R91.2@96.2,72.3 ; R87.1@96.2,70.7 R91.2@96.2,72.3 ; R93.2@96.2,73.8 R91.2@96.2,72.3
  Int2 (PWR-3V3) w0.2: v1(39.033,72.553) 39.119,72.639 39.311,72.639 39.622,72.95 61.05,72.95 62.4,71.6 94.3,71.6 94.658,71.958 94.658,72.358 v1(94.7,72.4)
MCU_DSEL_L1_2: R104.2 R107.1 U3.27 | length 136.3
  Top Layer w0.15: U3.27@39.05,81.9 39.1,81.85 39.1,80.3 39.706,79.694 v1(39.724,79.694) ; v1(49.3,59) 49.9,58.4 R104.2@50.6,58.4 50.6,58.325 51.725,57.2 52.7,57.2 54.1,55.8 114,55.8 115.4,54.4 v1(115.4,29) ; R107.1@103.45,26.9 103.787,27.237 104.037,27.237 v1(104.8,28)
  Bottom Layer w0.15: v1(39.724,79.694) 39.679,79.649 39.679,79.221 40.6,78.3 40.6,64.5 46.2,58.9 v1@49.3,58.9 ; v1(104.8,28) 104.9,27.9 105,27.9 105.6,27.3 114.3,27.3 115.4,28.4 v1(115.4,29)
MCU_DSEL_L3_4: R115.2 R118.1 U3.41 | length 88.4
  Top Layer w0.15: R115.2@22.3,77.6 22.3,75.8 22.8,75.3 32.9,75.3 33.475,75.875 34.525,75.875 U3.41@34.6,75.95 38.879,75.95 39.012,75.817 v1(39.142,75.817) ; R118.1@85.3,43.5 85.3,44.3 85.77,44.77 v1(85.815,44.77)
  Bottom Layer w0.15: v1(39.142,75.817) 39.017,75.817 38.5,75.3 38.5,64.9 56.425,46.975 85.037,46.975 85.8,46.212 85.8,44.785 v1(85.815,44.77)
MCU_IN_H1: R19.2 R22.1 U3.35 | length 43.6
  Top Layer w0.15: R19.2@31.5,77.6 31.762,77.862 32.162,77.862 33.25,78.95 U3.35@34.6,78.95 35.715,78.95 36.29,79.525 v1(36.29,79.613) ; v1(40.3,45.2) 40.3,45.065 40.4,44.965 R22.1@40.4,43.6
  Bottom Layer w0.15: v1(36.29,79.613) 36.29,79.552 36,79.262 36,63.2 39.6,59.6 39.6,45.9 v1(40.3,45.2)
MCU_IN_H2: R18.2 R28.1 U3.36 | length 49.7
  Top Layer w0.15: R18.2@30,77.6 30,76.788 30.088,76.7 31.94,76.7 33.69,78.45 U3.36@34.6,78.45 36.15,78.45 v1(36.663,78.963) ; R28.1@50.4,43.6 v1(50.4,45.4)
  Bottom Layer w0.15: v1(36.663,78.963) 36.663,78.888 36.4,78.625 36.4,63.6 50.4,49.6 v1(50.4,45.4)
MCU_IN_H3: R152.2 R155.1 U3.37 | length 56.2
  Top Layer w0.15: R152.2@28.5,77.6 28.5,76.538 28.588,76.45 32.05,76.45 33.55,77.95 U3.37@34.6,77.95 36.85,77.95 v1(37.2,78.3) ; v1(58.3,45.3) 58.3,45.165 58.5,44.965 R155.1@58.5,43.4
  Bottom Layer w0.15: v1(37.2,78.3) 37.2,78.262 36.9,77.962 36.9,63.8 55.4,45.3 v1(58.3,45.3)
MCU_IN_L1: R103.2 R108.1 U3.28 | length 142.6
  Top Layer w0.15: U3.28@38.55,81.9 38.625,81.825 38.625,80.036 38.969,79.692 v1(38.974,79.692) ; v1(49.3,56.9) 49.396,56.804 49.396,56.604 50,56 R103.2@50.6,56 50.6,55.925 50.975,55.55 51.05,55.55 51.9,54.7 114.1,54.7 114.7,54.1 114.7,21.6 114.1,21 104.4,21 103.9,21.5 103.9,22.475 103.45,22.925 R108.1@103.45,23
  Bottom Layer w0.15: v1(38.974,79.692) 38.97,79.688 38.97,79.23 40.2,78 40.2,64.3 47.6,56.9 v1(49.3,56.9)
MCU_IN_L2: R102.2 R109.1 U3.26 | length 137.6
  Top Layer w0.15: U3.26@39.55,81.9 39.55,80.65 40.126,80.074 40.144,80.074 40.306,79.913 v1(40.442,79.913) ; v1(49.3,60.9) 49.338,60.9 49.638,60.6 R102.2@50.6,60.6 ; v1(84.1,52.8) 84.2,52.8 85,53.6 113.7,53.6 114.2,53.1 114.2,29.688 113.812,29.3 104.25,29.3 103.9,28.95 103.825,28.95 103.45,28.575 R109.1@103.45,28.5
  Bottom Layer w0.15: v1(40.442,79.913) 40.4,79.871 40.4,79.3 41,78.7 41,64.6 44.8,60.8 48.962,60.8 ; v1(49.3,60.9) 50.8,59.4 50.8,54.1 54.5,50.4 81.7,50.4 v1(84.1,52.8)
MCU_IN_L3: R114.2 R119.1 U3.29 | length 81.2
  Top Layer w0.15: U3.29@38.05,81.9 38,81.85 38,80.067 38.225,79.842 v1(38.225,79.729) ; v1(49,55.3) 49.096,55.204 49.096,55.004 50.15,53.95 50.225,53.95 50.6,53.575 R114.2@50.6,53.5 ; R119.1@88.8,43.5 88.8,44.6 v1(89,44.8)
  Bottom Layer w0.15: v1(38.225,79.729) 38.299,79.654 38.299,79.326 39.8,77.825 39.8,64.1 48.561,55.339 48.961,55.339 49.089,55.211 49.089,54.911 56.625,47.375 71.563,47.375 71.613,47.325 72.587,47.325 72.637,47.375 88.625,47.375 89,47 v1(89,44.8)
MCU_IN_L4: R113.2 R120.1 U3.40 | length 84.1
  Top Layer w0.15: R113.2@23.8,77.6 23.8,76 24.2,75.6 32.7,75.6 33.475,76.375 34.525,76.375 U3.40@34.6,76.45 38.75,76.45 v1(38.766,76.466) ; v1(83.7,46.3) 84.4,47 R120.1@85.1,47
  Bottom Layer w0.15: v1(38.766,76.466) 38.1,75.8 38.1,64.6 41.3,61.4 41.314,61.4 41.9,60.814 41.9,60.8 56.1,46.6 83.265,46.6 83.565,46.3 v1(83.7,46.3)
MCU_IN_M1: R33.2 R36.1 U3.38 | length 70.2
  Top Layer w0.15: R33.2@27,77.6 27,76.5 27.3,76.2 32.4,76.2 33.575,77.375 34.525,77.375 U3.38@34.6,77.45 37.462,77.45 37.709,77.696 v1(37.796,77.696) ; v1(71.5,44.9) 71.5,44.765 71.7,44.565 R36.1@71.7,43.4
  Bottom Layer w0.15: v1(37.796,77.696) 37.3,77.2 37.3,64.1 40.5,60.9 41.4,60 55.55,45.85 70.55,45.85 v1(71.5,44.9)
MCU_IN_M2: R32.2 R42.1 U3.39 | length 80.1
  Top Layer w0.15: R32.2@25.4,77.6 25.4,76.2 25.7,75.9 32.6,75.9 33.575,76.875 34.525,76.875 U3.39@34.6,76.95 38.15,76.95 v1(38.2,77) ; R42.1@79.8,43.4 80,43.6 v1(80,45.8)
  Bottom Layer w0.15: v1(38.2,77) 37.7,76.5 37.7,64.3 55.775,46.225 79.487,46.225 79.912,45.8 v1(80,45.8)
MCU_IS_H1: C32.1 R23.1 U3.23 | length 45.5
  Top Layer w0.15: R23.1@33.5,43.3 33.5,46.925 33.625,47.05 33.7,47.05 34.075,47.425 34.075,49.275 45.3,60.5 v1(45.3,61.3) ; U3.23@41.05,81.9 41.05,79.885 41.2,79.735 v1(41.2,79.6)
  Bottom Layer w0.15: v1(41.2,79.6) 41.2,79.465 41.4,79.265 41.4,64.772 44.847,61.325 45.275,61.325 v1(45.3,61.3)
MCU_IS_H2: C36.1 R29.1 U3.22 | length 40
  Top Layer w0.15: U3.22@41.55,81.9 41.55,80.25 v1(42.2,79.6) ; R29.1@46.1,47.3 46.1,49.283 46.217,49.4 C36.1@47.475,49.4 47.475,61.325 46.939,61.861 46.539,61.861 v1(46.5,61.9)
  Bottom Layer w0.15: v1(42.2,79.6) 41.7,79.1 41.7,65 44.796,61.904 45.111,61.904 45.114,61.9 v1(46.5,61.9)
MCU_IS_H3: C74.1 R156.1 U3.21 | length 40.3
  Top Layer w0.15: U3.21@42.05,81.9 42.05,80.55 v1(43,79.6) ; R156.1@54.2,49.6 54.2,50.712 54.288,50.8 C74.1@56,50.8 56,52 v1(56.4,52.4)
  Bottom Layer w0.15: v1(43,79.6) 43.089,79.511 43.389,79.511 44.3,78.6 44.3,67.3 56.4,55.2 v1(56.4,52.4)
MCU_IS_L1_2: C65.1 R110.1 U3.14 | length 118.1
  Top Layer w0.15: U3.14@46,78.95 47.162,78.95 47.412,79.2 v1(47.5,79.2) ; C65.1@110.15,26.225 110.15,27.4 109.7,27.85 109.625,27.85 109.25,28.225 R110.1@109.25,28.3 110.465,28.3 110.565,28.4 v1(110.7,28.4)
  Bottom Layer w0.15: v1(47.5,79.2) 48.1,79.2 48.5,78.8 48.5,65.5 60.4,53.6 112.6,53.6 114.3,51.9 114.3,29.2 113.5,28.4 v1(110.7,28.4)
MCU_IS_L3_4: C70.1 R121.1 U3.15 | length 58.9
  Top Layer w0.15: U3.15@46,79.45 46.075,79.525 46.725,79.525 v1(47.4,80.2) ; v1(79.9,52.8) 80.5,52.8 80.65,52.65 80.725,52.65 81.1,52.275 R121.1@81.1,52.2 81.1,52.125 80.725,51.75 80.65,51.75 80.4,51.5 C70.1@80.4,50.025
  Bottom Layer w0.15: v1(47.4,80.2) 46.888,80.2 46.8,80.112 46.8,78.9 48.1,77.6 48.1,65.2 52.5,60.8 60.2,53.1 79.8,53.1 79.804,53.096 79.804,52.896 v1(79.9,52.8)
MCU_IS_M1: C40.1 R37.1 U3.20 | length 49.1
  Top Layer w0.15: U3.20@42.55,81.9 42.55,80.75 43.261,80.039 43.661,80.039 v1(43.7,80) ; v1(59,52.3) 67.5,52.3 ; R37.1@67.4,50.1 67.4,52.2 67.5,52.3 ; C40.1@68.775,52.3 67.5,52.3
  Bottom Layer w0.15: v1(43.7,80) 44.4,80 44.7,79.7 44.7,67.4 59,53.1 v1(59,52.3)
MCU_IS_M2: C44.1 R43.1 U3.16 | length 54.6
  Top Layer w0.15: U3.16@46,79.95 46.212,79.95 46.287,80.025 46.287,80.237 46.8,80.75 v1(46.8,80.9) ; v1(74.5,51.5) 74.9,51.1 74.9,50.8 ; R43.1@74.9,49.5 74.9,50.8 ; C44.1@76.675,50.8 76.575,50.9 75,50.9 74.9,50.8
  Bottom Layer w0.15: v1(46.8,80.9) 46.3,80.4 46.3,78.8 47.7,77.4 47.7,65 61,51.7 74.412,51.7 74.5,51.612 v1(74.5,51.5)
MCU_OSC_IN: C19.1 U3.5 X1.1 | length 14.2
  Top Layer w0.15: U3.5@46,74.45 48.15,74.45 48.5,74.1 48.5,69.388 48.881,69.006 51.844,69.006 52.75,68.1 X1.1@52.75,68 52.75,66.325 C19.1@52.525,66.1
MCU_OSC_OUT: C20.1 U3.6 X1.3 | length 11.2
  Top Layer w0.15: U3.6@46,74.95 48.45,74.95 49.3,74.1 49.3,70.288 49.388,70.2 X1.3@51.05,70.2 51.05,71.975 C20.1@51.175,72.1
MCU_RST: C21.1 J1.10 TP5.1 U3.7 | length 111.9
  Top Layer w0.15: J1.10@20.44,17.735 20.667,17.962 20.667,21.667 v1(21.3,22.3) ; U3.7@46,75.45 49.25,75.45 49.3,75.4 50.1,74.6 C21.1@51.175,74.6 50.775,75 50.775,75.121 50.687,75.209 50.391,75.209 v1(50.3,75.3)
  Bottom Layer w0.15: v1(21.3,22.3) 21.3,27 26.3,32 26.3,45.9 32,51.6 32,64 33.3,65.3 35.3,65.3 35.5,65.5 35.5,81.4 40.6,86.5 43.7,86.5 48.5,91.3 TP5.1@48.8,91.3 50.3,89.8 v1(50.3,75.3)
MCU_SENS1: C45.1 R49.1 R54.2 R60.2 U3.8 | length 31.2
  Top Layer w0.15: U3.8@46,75.95 60.212,75.95 60.3,75.862 R49.1@60.3,68.061 R54.2@60.3,66.161 60.3,65.3 60.4,65.2 ; R60.2@58,63.7 58.1,63.8 58.1,65.112 58.188,65.2 60.4,65.2 ; C45.1@61.725,63.961 61.725,64.875 61.4,65.2 60.4,65.2
MCU_SENS2: C49.1 R65.1 R70.2 R76.2 U3.9 | length 43.2
  Top Layer w0.15: U3.9@46,76.45 60.25,76.45 60.7,76 60.7,70.6 62,69.3 72.501,69.3 73.25,68.551 73.325,68.551 73.7,68.176 R65.1@73.7,68.101 R70.2@73.7,66.175 ; R76.2@71.5,64.175 71.5,65.112 71.588,65.2 73.8,65.2 ; R70.2@73.7,66.175 73.7,65.3 73.8,65.2 ; C49.1@75.125,63.975 75.2,64.05 75.2,65.1 75.1,65.2 73.8,65.2